# EAGLE board 1-to-4-demux (EAGLE 9.7.0)

Size 149.3 x 50.33 mm. Coordinates in mm from the lower left corner, seen from the top.
Outline: 0,0 149.29,0 149.29,50.34 0,50.34 0,0
Copper layers (1*16): Top 0.035mm / dielectric 1.5mm / Bottom 0.035mm
Design rules "default": minimum track width 6mil, minimum drill 0.35mm, track to track 6mil, track to pad 6mil, pad to pad 6mil, via to via 6mil, smd to smd 6mil, copper to edge 40mil, drill to drill 6mil, minimum pad ring 10mil, minimum via ring 8mil, stop-mask expansion 4mil, vias tented up to drill 0mil, thermal gap 10mil

## Footprints (pad centres in the part's own frame; a part is rotated, then mirrored left to right if it is on the bottom)
LEDRD254W60D565H860B_O = drill 0.981 pad 1.581: 1 -1.27,0; 2 1.27,0
LEDRD254W60D565H860B_G = drill 0.981 pad 1.581: 1 -1.27,0; 2 1.27,0
LEDRD254W60D565H860B_B = drill 0.981 pad 1.581: 1 -1.27,0; 2 1.27,0
LEDRD254W60D565H860B = drill 0.981 pad 1.581: 1 -1.27,0; 2 1.27,0
BATTERY-GENERIC = drill 1.118 pad 3.15 octagon: + 2.54,0; - -2.54,0
RESAD1016W63L850D250B = drill 0.83 pad 1.43: 1 -5.08,0; 2 5.08,0
SWITCH-SPDT-PTH-8.5X3.7MM = drill 1.016 pad 1.88: 1 -2.54,0; 2 0,0; 3 2.54,0
DIP762W53P254L1969H508Q14B = drill 0.743 pad 1.343: 1 -3.81,7.62; 2 -3.81,5.08; 3 -3.81,2.54; 4 -3.81,0; 5 -3.81,-2.54; 6 -3.81,-5.08; 7 -3.81,-7.62; 8 3.81,-7.62; 9 3.81,-5.08; 10 3.81,-2.54; 11 3.81,0; 12 3.81,2.54; 13 3.81,5.08; 14 3.81,7.62

## Placement (x,y rotation side)
D1  ORANGE  [LEDRD254W60D565H860B_O]  105.21,24.21 180 top
D2  GREEN  [LEDRD254W60D565H860B_G]  110.29,24.21 180 top
D3  BLUE  [LEDRD254W60D565H860B_B]  115.37,24.21 180 top
D4  RED  [LEDRD254W60D565H860B]  120.45,24.21 180 top
P1  BATTERYGENERIC  [BATTERY-GENERIC]  141.04,42.08 180 top
R1  1k  [RESAD1016W63L850D250B]  103.94,8.97 90 top
R2  1k  [RESAD1016W63L850D250B]  109.02,8.97 90 top
R3  1k  [RESAD1016W63L850D250B]  114.1,8.97 90 top
R4  1k  [RESAD1016W63L850D250B]  119.18,8.97 90 top
S1  TOGGLE  [SWITCH-SPDT-PTH-8.5X3.7MM]  7.42,19.13 0 top
S2  TOGGLE  [SWITCH-SPDT-PTH-8.5X3.7MM]  15.04,19.13 0 top
S3  TOGGLE  [SWITCH-SPDT-PTH-8.5X3.7MM]  22.66,19.13 0 top
U1  74HC04_PDIP  [DIP762W53P254L1969H508Q14B]  45.52,10.24 90 top
U2  74HC11_PDIP  [DIP762W53P254L1969H508Q14B]  68.38,10.24 90 top
U3  74HC11_PDIP  [DIP762W53P254L1969H508Q14B]  91.24,10.24 90 top

## Library data of the parts
D1 = Tinkercad; CATEGORY: Opto-Electronic; SUB-CATEGORY: LED; VALUE: LED_ORANGE
D2 = Tinkercad; CATEGORY: Opto-Electronic; SUB-CATEGORY: LED; VALUE: LED_GREEN
D3 = Tinkercad; CATEGORY: Opto-Electronic; SUB-CATEGORY: LED; VALUE: LED_BLUE
D4 = Tinkercad; CATEGORY: Opto-Electronic; SUB-CATEGORY: LED; VALUE: LED_RED
P1 R1-R4 S1-S3 U1-U3 = Tinkercad

## Nets
D1_C: D1.2 R1.2
D2_C: D2.2 R2.2
D3_C: D3.2 R3.2
D4_C: D4.2 R4.2
P1+: P1.+ S1.3 S2.3 S3.3 U1.14 U2.14 U3.14
P1-: P1.- R1.1 R2.1 R3.1 R4.1 S1.1 S2.1 S3.1 U1.7 U2.7 U3.7
U1_1A: S2.2 U1.1 U2.2 U3.11
U1_1Y: U1.2 U2.4 U3.2
U1_2Y: U1.4 U3.1 U3.10
U2_1A: S1.2 U1.3 U2.1 U2.3
U2_1C: S3.2 U2.5 U2.13 U3.9 U3.13
U2_1Y: D4.1 U2.12
U2_2Y: D3.1 U2.6
U3_1Y: D1.1 U3.12
U3_3Y: D2.1 U3.8

## Tracks (layer width: path | path; a pad name or v marks a point on that pad's centre or on a via)
D1_C  (1 unrouted)
D2_C  (1 unrouted)
D3_C  (1 unrouted)
D4_C  (1 unrouted)
P1+  (6 unrouted)
P1-  (10 unrouted)
U1_1A  (3 unrouted)
U1_1Y  (2 unrouted)
U1_2Y  (2 unrouted)
U2_1A  (3 unrouted)
U2_1C  (4 unrouted)
U2_1Y  (1 unrouted)
U2_2Y  (1 unrouted)
U3_1Y  (1 unrouted)
U3_3Y  (1 unrouted)